# EAGLE board TSOC_USBUART2 (EAGLE 6.6.0)
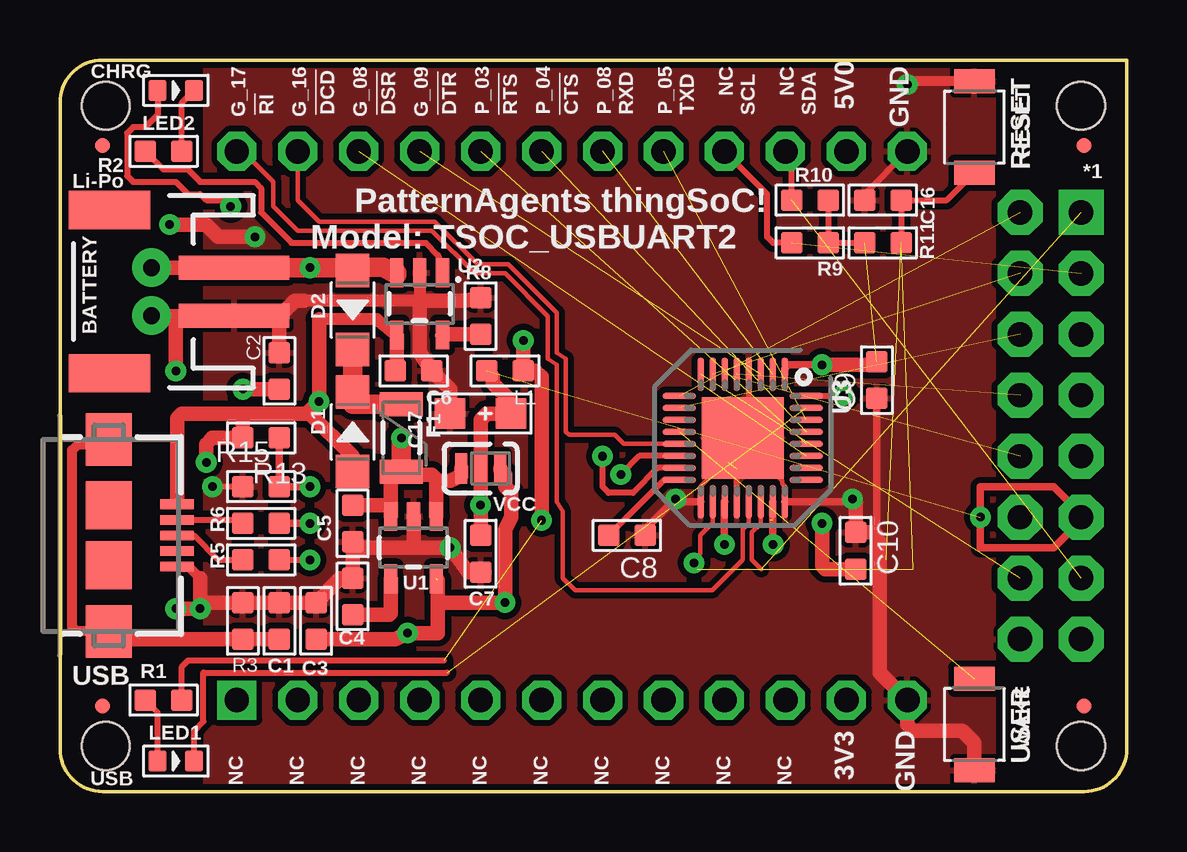
[diagram p0: board, top side]
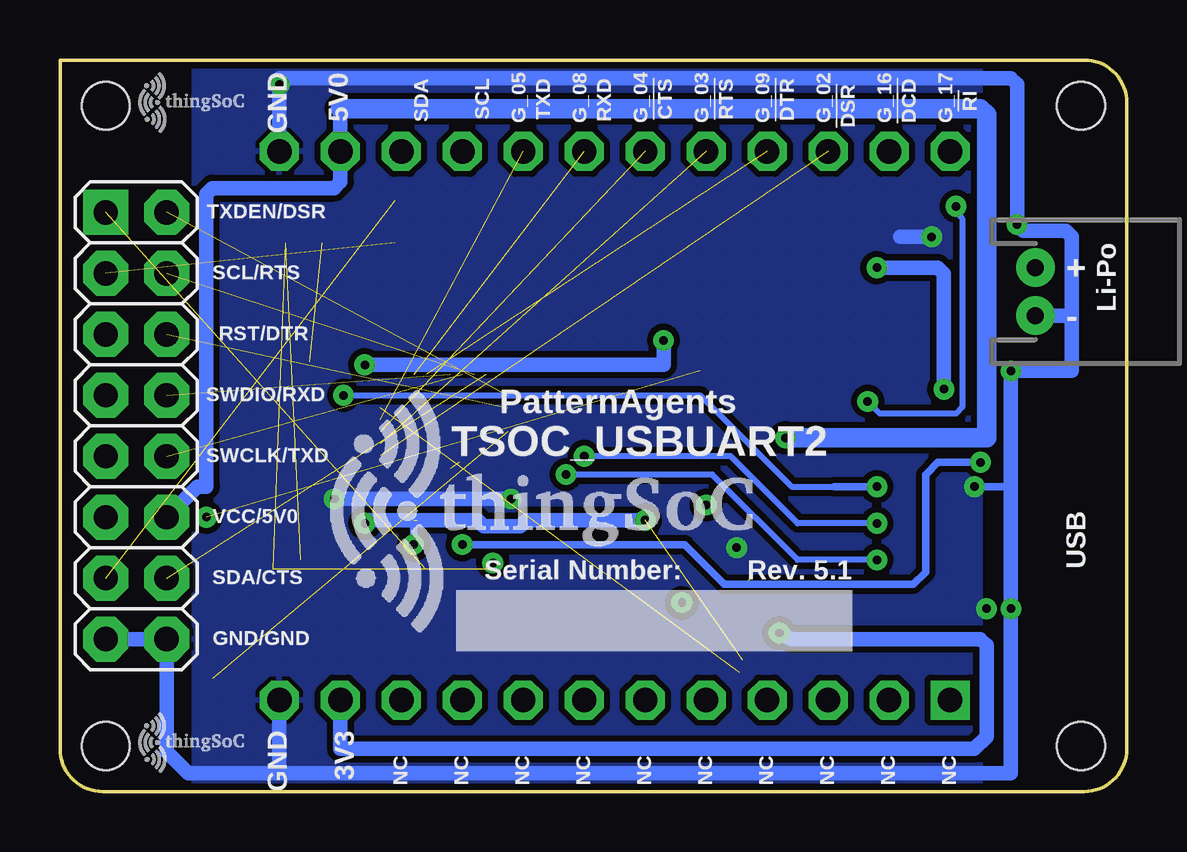
[diagram p1: board, bottom side, seen from below]

Size 44.45 x 30.48 mm. Coordinates in mm from the lower left corner, seen from the top.
Copper layers (1*16): Top 0.035mm / dielectric 1.5mm / Bottom 0.035mm
Design rules "PatternAgents_7mil": minimum track width 7mil, minimum drill 14mil, track to track 7mil, track to pad 7mil, pad to pad 7mil, via to via 7mil, smd to smd 7mil, copper to edge 7mil, drill to drill 7mil, minimum pad ring 12mil, minimum via ring 10mil, stop-mask expansion 4mil, vias tented up to drill 25mil, thermal gap 7mil
Net classes: 1 vcc: width 0.254 mm

## Footprints (pad centres in the part's own frame; a part is rotated, then mirrored left to right if it is on the bottom)
TSOC-BB-S24 = drill 1.016 square: 1B -11.43,11.43 | drill 1.016 octagon: 1C 11.43,11.43; 2B -11.43,8.89; 2C 11.43,8.89; 3B -11.43,6.35; 3C 11.43,6.35; 4B -11.43,3.81; 4C 11.43,3.81; 5B -11.43,1.27; 5C 11.43,1.27; 6B -11.43,-1.27; 6C 11.43,-1.27; 7B -11.43,-3.81; 7C 11.43,-3.81; 8B -11.43,-6.35; 8C 11.43,-6.35; 9B -11.43,-8.89; 9C 11.43,-8.89; 10B -11.43,-11.43; 10C 11.43,-11.43; 11B -11.43,-13.97; 11C 11.43,-13.97; 12B -11.43,-16.51; 12C 11.43,-16.51
JST-2-SMD = smd 1 x 4.6: 1 -1,-3.7; 2 1,-3.7 | smd 1.6 x 3.4: NC1 -3.4,1.5; NC2 3.4,1.5
C0603 = smd 0.889 x 0.889: 1 0,0.762; 2 0,-0.762
AVX-A = smd 1.27 x 1.27: + -1.27,0; - 1.27,0
SOD-123 = smd 1.397 x 1.397: + -1.651,0; - 1.651,0
PTC-1206 = smd 1 x 1.8: 1 -1.4,0; 2 1.4,0
MICRO-FIDUCIAL = smd 0.635 x 0.635: 1 0,0
JST-2-PTH-NS = drill 0.7 pad 1.6: 1 -1,0; 2 1,0
2X8 = drill 1.016 pad 1.88 square: 1 0,0 | drill 1.016 pad 1.88 octagon: 2 0,2.54; 3 2.54,0; 4 2.54,2.54; 5 5.08,0; 6 5.08,2.54; 7 7.62,0; 8 7.62,2.54; 9 10.16,0; 10 10.16,2.54; 11 12.7,0; 12 12.7,2.54; 13 15.24,0; 14 15.24,2.54; 15 17.78,0; 16 17.78,2.54
L0603 = smd 0.889 x 0.889: 1 -0.762,0; 2 0.762,0
LED-0603 = smd 0.762 x 0.889: + -0.762,0; - 0.762,0
R0603 = smd 0.889 x 0.889: 1 0,0.762; 2 0,-0.762
SW2-2.6-3.0X2.5X1.2+0.4MM = smd 1 x 1.7: 1 -1.9,0; 2 1.9,0
SOT23-5 = smd 0.55 x 1.2: 1 -0.95,-1.3; 2 0,-1.3; 3 0.95,-1.3; 4 0.95,1.3; 5 -0.95,1.3
QFN32-PROTO = smd 1.4 x 0.254: 1 -2.65,1.75; 2 -2.65,1.25; 3 -2.65,0.75; 4 -2.65,0.25; 5 -2.65,-0.25; 6 -2.65,-0.75; 7 -2.65,-1.25; 8 -2.65,-1.75; 17 2.65,-1.75; 18 2.65,-1.25; 19 2.65,-0.75; 20 2.65,-0.25; 21 2.65,0.25; 22 2.65,0.75; 23 2.65,1.25; 24 2.65,1.75 | smd 0.254 x 1.4: 9 -1.75,-2.65; 10 -1.25,-2.65; 11 -0.75,-2.65; 12 -0.25,-2.65; 13 0.25,-2.65; 14 0.75,-2.65; 15 1.25,-2.65; 16 1.75,-2.65; 25 1.75,2.65; 26 1.25,2.65; 27 0.75,2.65; 28 0.25,2.65; 29 -0.25,2.65; 30 -0.75,2.65; 31 -1.25,2.65; 32 -1.75,2.65 | smd 3.4 x 3.4: EXP 0,0
TSOC-BB-BRD-DIM = hole 2: 13.335,16.891; -13.335,16.891; 13.335,-23.749; -13.335,-23.749
USB-AB-MICRO-SMD = smd 1.4 x 0.4: D+ 2.85,0; D- 2.85,0.65; GND 2.85,-1.3; ID 2.85,-0.65; VBUS 2.85,1.3 | smd 1.9 x 2: P$6 0,1.25; P$7 0,-1.25 | smd 1.9 x 2.2: SHIELD1 0,4; SHIELD2 0,-4
JMP-3-1_2 = smd 0.508 x 1.27: 1 -0.813,0; 2 0,0; 3 0.813,0

## Placement (x,y rotation side)
A  TSOC-24-BB  [TSOC-BB-S24]  18.8,15.24 90 top
BATTERY  [JST-2-SMD]  3.56,20.83 90 top
C1  100nf  [C0603]  9.14,7.11 180 top
C2  1uf  [C0603]  9.14,17.53 180 top
C3  10uf  [C0603]  10.67,7.11 0 top
C4  100nf  [C0603]  12.19,8.13 180 top
C5  10uf  [C0603]  12.19,11.18 0 top
C6  1uf  [C0603]  14.73,17.53 90 top
C7  10uf  [C0603]  17.53,9.91 180 top
C8  1uf  [C0603]  23.62,10.67 270 top
C9  100nf  [C0603]  34.04,17.14 180 top
C10  100nf  [C0603]  33.15,10.03 0 top
C16  100nf  [C0603]  34.29,24.64 270 top
C17  47uf  [AVX-A]  17.53,15.75 180 top
D1  20V-1A  [SOD-123]  12.19,14.99 90 top
D2  20V-1A  [SOD-123]  12.19,20.07 270 top
F1  500mA-PTC  [PTC-1206]  14.22,14.73 270 top
FID1  FIDUCIALUFIDUCIAL  [MICRO-FIDUCIAL]  1.78,3.56 180 top
FID2  FIDUCIALUFIDUCIAL  [MICRO-FIDUCIAL]  1.78,26.92 180 top
FID3  FIDUCIALUFIDUCIAL  [MICRO-FIDUCIAL]  42.67,3.56 180 top
FID4  FIDUCIALUFIDUCIAL  [MICRO-FIDUCIAL]  42.67,26.92 180 top
J1P  [JST-2-PTH-NS]  3.81,20.83 270 bottom
J3  [2X8]  42.55,24.13 270 bottom
L1  330OHM-500MA  [L0603]  18.54,17.53 0 top
LED1  GREEN-0603  [LED-0603]  4.83,1.27 0 top
LED2  YELLOW-0603  [LED-0603]  4.83,29.21 0 top
R1  1K 1/10W  [R0603]  4.32,3.81 90 top
R2  1K 1/10W  [R0603]  4.32,26.67 90 top
R3  1M 1/10W  [R0603]  7.62,7.11 180 top
R5  22R  [R0603]  8.38,9.65 90 top
R6  22R  [R0603]  8.38,11.18 90 top
R8  10K 1/10W  [R0603]  17.53,19.81 0 top
R9  10K 1/10W  [R0603]  31.24,22.86 90 top
R10  10K 1/10W  [R0603]  31.24,24.64 90 top
R11  10K 1/10W  [R0603]  34.29,22.86 270 top
R13  22K  [R0603]  8.38,14.73 90 top
R15  10K  [R0603]  8.38,12.7 270 top
RESET  B3U-1000P-2P-SMD  [SW2-2.6-3.0X2.5X1.2+0.4MM]  38.1,27.69 270 top
U1  AP2112K-3.3V  [SOT23-5]  14.73,10.16 180 top
U2  MCP73831  [SOT23-5]  14.99,20.32 180 top
U3  CY7C65215-32-PROTO  [QFN32-PROTO]  28.45,14.73 270 top
U$1  TSOC-PCB-SINGLE  [TSOC-BB-BRD-DIM]  18.8,15.24 90 top
U$100  TSOC-LOGO-LRG  [TSOC-LOGO-LRG]  29.97,11.68 0 bottom
U$101  TSOC-LOGO-SMALL  [TSOC-LOGO-SML]  40.39,2.03 0 bottom
U$102  TSOC-LOGO-SMALL  [TSOC-LOGO-SML]  40.39,28.7 0 bottom
USB  USB_AB  [USB-AB-MICRO-SMD]  2.03,10.67 0 top
USER  B3U-1000P-2P-SMD  [SW2-2.6-3.0X2.5X1.2+0.4MM]  38.1,2.79 90 top
VCC  JMP-3-1_2  [JMP-3-1_2]  17.53,13.46 180 top

## Library data of the parts
A U$1 U$100-U$102 = thingSoC
BATTERY = TSOC-ESP8266-BASE; BTM_NEG: -; BTM_POS: +; PROD_ID: CONN-11443; TOP_NEG: -; TOP_POS: +
C1 C4 C9 C10 C16 = Seeed-Capacitor-2016; MPN: CC0603KRX7R9BB104
C2 C6 C8 = Seeed-Capacitor-2016; MPN: CC0603KRX7R8BB105
C3 C5 C7 = Seeed-Capacitor-2016; MPN: CC0603KRX5R6BB106
C17 = Seeed-Capacitor-2016; MPN: TAJA476*006#NJ
D1 D2 = Seeed-Diode-2016; MPN: B5819W
F1 = SparkFun
FID1-FID4 J1P = TSOC-ESP8266-BASE
J3 = PatternAgents-ProtoPads
L1 = Seeed-Inductor-2016; MPN: BLM18AG121SN1D
LED1 = Seeed-LED-2016; MPN: 19-217-G7C-AN1P2-3T
LED2 = Seeed-LED-2016; MPN: 19-217-Y5C-AM1N1VY-3T
R1 R2 = Seeed-Resistor-2016; MPN: RC0603JR-071KL
R3 = Seeed-Resistor-2016; MPN: RC0603JR-071ML
R5 R6 = Seeed-Resistor-2016; MPN: RC0603JR-0722RL
R8-R11 = Seeed-Resistor-2016; MPN: RC0603JR-0710KL
R13 = Seeed-Resistor-2016; MPN: RC0603JR-0722KL
R15 = Seeed-Resistor-2016; MPN: RC0603FR-0710KL
RESET USER = Seeed-Switch-2016; MPN: B3U-1000P-2P-SMD
U1 = SparkFun-PowerIC; PROD_ID: VREG-12457
U2 = TSOC-ESP8266-BASE; PROD_ID: IC-09995
U3 = PatternAgents-Cypress
USB = BeeSafe
VCC = PatternAgents-ProtoPads; BOM: EXCLUDE

## Nets
3V3: A.11B C3.2 U1.5 VCC.1
5V0: A.11C C5.1 F1.2 J3.12 U1.1 U1.3 VCC.3
!CTS: A.6C U3.29
!CTS1: J3.14 U3.8
!DCD: A.2C U3.13
!DSR: A.3C U3.27
!DSR1: J3.2 U3.9
!DTR: A.4C U3.3
!DTR1: J3.6 U3.10
!POWER: LED1.- U3.31
!RI: A.1C U3.21
!RTS: A.5C U3.28
!RTS1: J3.4 U3.7
!RX_LED: U3.26
!TX_LED: U3.25
!XRES: C16.1 R11.1 RESET.2 U3.18
BUS_DET: R13.2 R15.1 U3.32
BYPASS1: C4.1 U1.4
CLED: LED2.- R2.2
CSTAT: R2.1 U2.1
GND: A.12B A.12C BATTERY.1 C1.2 C2.2 C3.1 C4.2 C5.2 C6.2 C7.1 C8.1 C9.1 C10.1 C16.2 C17.- J1P.2 J3.15 J3.16 R3.2 R8.1 R15.2 RESET.1 U1.2 U2.2 U3.4 U3.17 U3.20 U3.24 U3.EXP USB.GND USER.1
N$1: R8.2 U2.5
N$17: LED1.+ R1.1
RXD: A.7C U3.2
RXD1: J3.8 U3.5
SCL: A.9C J3.3 R9.1
SDA: A.10C J3.13 R10.1
SUSP: U3.11
TXD: A.8C U3.30
TXD1: J3.10 U3.6
TXDEN_1: J3.1 U3.22
USB1_DM: R6.2 U3.15
USB1_DP: R5.2 U3.14
USB1_M: R6.1 USB.D-
USB1_P: R5.1 USB.D+
USB1_SHIELD: C1.1 R3.1 USB.SHIELD1 USB.SHIELD2
VBAT: BATTERY.2 C2.1 D2.+ J1P.1 U2.3
VBUS: C6.1 D1.+ LED2.+ R13.1 U2.4 U3.19 USB.VBUS
VCC: C7.2 C17.+ J3.11 L1.1 VCC.2
VCCD: C8.2 U3.16
VDDIO: C9.2 C10.2 L1.2 R1.2 R9.2 R10.2 R11.2 U3.1 U3.23
VIN: D1.- D2.- F1.1
WAKE: U3.12 USER.2

## Tracks (layer width: path | path; a pad name or v marks a point on that pad's centre or on a via)
3V3  (via drill 0.36)  (1 unrouted)
  Top 0.61: C3.2 13.97,6.35 v14.48,6.6 15.75,6.6 15.75,7.87 | VCC.1 18.34,13.41 18.54,13.21 18.54,12.7 18.8,12.45 18.8,11.43 18.54,10.92 v18.54,7.87 15.75,7.87 | 15.75,8.79 15.75,7.87
  Bottom 0.61: v14.48,6.6 13.97,6.35 6.1,6.35 5.84,6.1 5.84,2.29 6.35,1.78 32.77,1.78 A.11B
5V0  (via drill 0.36)
  Top 0.61: C5.1 13.75,11.94 U1.3 13.78,13.14 F1.2 13.84,13.21 15.49,13.21 15.68,13.02 | U1.1 15.68,13.02 | VCC.3 16.71,13.16 16.26,12.95 15.75,12.95 15.68,13.02
  Top 0.813: F1.2 v14.22,14.73
  Bottom 0.61: 32.77,28.45 A.11C 32.77,25.4 33.02,25.15 38.1,25.15 38.35,24.89 38.35,12.7 38.73,12.7 J3.12
  Bottom 0.813: v14.22,14.73 5.84,14.73 5.84,28.19 6.1,28.45 32.77,28.45
!CTS  (1 unrouted)
!CTS1  (1 unrouted)
!DCD
  Top 0.178: U3.13 23.49,14.48 23.11,14.86 21.21,14.86 21.08,14.99 21.08,18.03 20.7,18.29 20.7,19.94 18.67,21.97 17.4,21.97 15.62,23.75 10.79,23.75 9.91,24.64 A.2C
!DSR  (1 unrouted)
!DSR1  (1 unrouted)
!DTR  (1 unrouted)
!DTR1  (1 unrouted)
!POWER  (1 unrouted)
  Top 0.254: LED1.- 5.59,2.54 5.97,2.92 5.97,4.95 16.13,4.95
!RI
  Top 0.178: U3.21 28.7,11.17 28.45,10.92 28.45,9.65 27.18,8.38 21.46,8.38 20.95,8.89 20.95,11.68 20.7,12.06 20.7,17.78 20.32,18.03 20.32,19.81 18.54,21.59 17.27,21.59 15.49,23.37 9.91,23.37 8.89,24.38 8.89,25.4 7.62,26.67 A.1C
!RTS  (1 unrouted)
!RTS1  (1 unrouted)
!XRES  (via drill 0.36)  (3 unrouted)
  Top 0.178: U3.18 27.2,11.2 26.67,10.67 26.67,9.91 v26.42,9.53
  Top 0.254: RESET.2 36.95,24.64 C16.1 R11.1
  Bottom 0.178: v26.42,9.53 26.42,9.4 26.54,9.27
BUS_DET  (via drill 0.36)
  Top 0.254: U3.32 32.74,16.48 v32.64,16.51
  Top 0.305: v10.41,12.7 R15.1 R13.2
  Bottom 0.254: v32.64,16.51 17.78,16.51 13.97,12.7 12.19,12.7
  Bottom 0.305: v10.41,12.7 12.19,12.7
BYPASS1
  Top 0.61: U1.4 13.78,7.43 13.72,7.37 C4.1
CLED
  Top 0.254: R2.2 5.08,28.7 LED2.-
CSTAT
  Top 0.254: U2.1 16,21.69 15.75,22.35 15.24,22.86 9.65,22.86 8.38,24.13 8.38,25.15 8.13,25.4 5.84,25.4 5.33,25.91 4.32,25.91 R2.1
GND  (via drill 0.36)  (1 unrouted)
  Top 0.178: 26.7,12.73 27.69,13.72 27.82,13.72 28.2,14.1 | U3.EXP 29.97,13.21 29.97,13.08 30.1,12.95 30.1,12.83 30.23,12.7 30.23,12.11 U3.24
  Top 0.254: R15.2 v6.35,12.7 | C16.2 33.53,24.89 A.12C | U3.20 28.2,14.1 28.2,14.48 U3.EXP 28.7,14.99 28.7,15.24 U3.4
  Top 0.305: 28.2,13.46 28.19,13.46 | C8.1 24.38,10.92 v25.65,12.19 25.76,12.08 U3.17 | C9.1 34.04,10.67 | U3.24 32.91,12.08 v33.02,12.19
  Top 0.406: USB.GND 5.36,9.37 5.84,8.89 | RESET.1 35.43,29.59 v35.31,29.46
  Top 0.508: U2.2 14.99,20.45 10.16,20.45
  Top 0.61: 5.84,8.89 v5.84,7.62 | 9.14,19.81 7.27,19.81 BATTERY.1 7.24,19.81 4.83,19.81 | C2.2 9.14,19.81 | R8.1 16.89,20.45 14.99,20.45 14.99,18.29 C6.2 16.26,16.76 C17.- | 4.83,19.81 v4.83,17.53 | 4.83,19.81 3.83,19.81 J1P.2 | v5.84,7.62 v4.83,7.62 | 14.73,10.16 U1.2 | USER.1 38.1,2.03 37.59,2.54 35.56,2.54 35.31,2.79 A.12B 34.16,4.95 34.16,10.41 34.04,10.54 34.04,10.67 33.91,10.79 C10.1 33.15,12.06 v33.02,12.19 | 10.16,20.45 9.78,20.45 9.14,19.81 | 14.73,10.16 v16.26,10.16 17.02,9.14 C7.1 | 14.73,10.16 12.45,10.16 C5.2 C4.2 11.68,8.89 C3.1 C1.2 R3.2 6.1,7.87 v5.84,7.62 | v4.57,23.62 6.1,23.62 6.6,23.11 v8.13,23.11
  Bottom 0.305: v6.35,12.7 4.83,12.7
  Bottom 0.61: 35.31,0.76 39.12,0.76 40.01,1.65 J3.16 J3.15 | 35.31,0.76 4.83,0.76 v4.83,7.62 4.83,12.7 v4.83,17.53 2.29,17.53 2.29,19.81 | A.12C v35.31,29.46 35.31,29.72 4.83,29.72 4.57,29.46 v4.57,23.62 4.32,23.37 2.54,23.37 2.29,23.11 2.29,19.81 | v8.13,23.11 9.45,23.11 | J1P.2 2.3,19.83 2.29,19.81 | A.12B 35.31,0.76 | v25.65,12.19 v33.02,12.19
  pour Top (isolate 0.254, hatched): 38.86,30.48 38.86,0 6.1,0 6.1,30.48
  pour Bottom (isolate 0.254, hatched): 38.86,30.48 38.86,0 6.1,0 6.1,30.48
N$1
  Top 0.61: R8.2 15.97,19.05 U2.5
N$17
  Top 0.254: LED1.+ 4.06,3.3 R1.1
RXD  (1 unrouted)
RXD1  (1 unrouted)
SCL  (1 unrouted)
  Top 0.254: R9.1 29.72,22.86 29.46,23.11 29.46,24.89 A.9C
SDA  (1 unrouted)
  Top 0.254: R10.1 30.48,26.42 A.10C
TXD  (1 unrouted)
TXD1  (1 unrouted)
TXDEN_1  (1 unrouted)
  Top 0.178: U3.22 29.2,11.16 28.83,10.79 28.83,9.65 29.21,9.27
USB1_DM  (via drill 0.36)
  Top 0.254: U3.15 24.91,13.48 23.88,12.45 22.86,12.45 22.61,12.7 v22.61,13.97
  Top 0.305: R6.2 v10.41,11.18
  Bottom 0.254: v10.41,11.18 13.72,11.18 16.51,13.97 v22.61,13.97
USB1_DP  (via drill 0.36)
  Top 0.254: R5.2 v10.41,9.65 | 25.79,13.97 U3.14 24.14,13.98 v23.37,13.21
  Bottom 0.254: v10.41,9.65 13.72,9.65 17.27,13.21 v23.37,13.21
USB1_M
  Top 0.254: USB.D- 7.48,11.32 R6.1
USB1_P
  Top 0.254: USB.D+ 5.59,10.67 6.6,9.65 R5.1
USB1_SHIELD
  Top 0.406: USB.SHIELD2 0.7,6.67 0.51,6.86 0.51,14.22 0.76,14.48 1.84,14.48
  Top 0.61: C1.1 R3.1 2.35,6.35 USB.SHIELD2 2.6,6.1 | 1.84,14.48 USB.SHIELD1
VBAT  (via drill 0.36)
  Top 0.61: C2.1 v7.62,16.76 | BATTERY.2 J1P.1
  Top 0.813: BATTERY.2 v10.41,21.83 11.57,21.83 D2.+ 12.32,21.84 13.46,21.84 14.04,21.52 U2.3
  Bottom 0.61: v7.62,16.76 7.62,21.57 7.87,21.83 v10.41,21.83
VBUS  (via drill 0.36)
  Top 0.178: USB.VBUS 4.98,11.91 4.88,12.19
  Top 0.254: LED2.+ 4.06,28.19 3.56,27.69 3.05,27.69 2.79,27.43 2.79,25.65 3.05,25.4 4.83,25.4 5.33,24.89 5.84,24.89 6.1,24.64 6.86,24.64 v7.11,24.38
  Top 0.305: v27.69,10.29 27.69,12.07 U3.19
  Top 0.508: U2.4 14,19.02 13.21,19.68 10.79,19.68
  Top 0.61: 10.79,19.68 v10.79,16.26 10.35,15.81 | U2.4 14.04,17.71 C6.1 | 4.88,12.19 4.88,15.55 5.08,15.75 7.62,15.75 | 7.62,15.75 10.29,15.75 10.35,15.81 | D1.+ 12.19,13.97 10.35,15.81 | v6.1,13.72 6.1,14.48 6.35,14.73 R13.1 7.62,15.75
  Bottom 0.254: v7.11,24.38 7.11,24.13 6.86,23.88 6.86,16 7.11,15.75 10.29,15.75 v10.79,16.26
  Bottom 0.305: v6.1,13.72 7.87,13.72 8.38,13.21 8.38,9.14 8.89,8.64 16.76,8.64 18.41,10.29 v27.69,10.29
VCC  (via drill 0.36)  (1 unrouted)
  Top 0.178: 17.42,10.77 C7.2
  Top 0.305: J3.11 42.55,11.3 41.4,10.16 38.35,10.16 v38.35,11.43 38.35,12.7 41.4,12.7 42.67,11.43
  Top 0.61: C7.2 v17.53,11.94 VCC.2 17.53,15.49 17.78,15.75 C17.+ 18.8,16.26 18.03,17.02 18.03,17.27 L1.1
VCCD
  Top 0.254: U3.16 25.17,12.98 C8.2
  Top 0.305: 22.99,10.79 C8.2
VDDIO  (via drill 0.36)  (3 unrouted)
  Top 0.254: R10.2 R9.2 R11.2 | R1.2 5.08,5.21 5.33,5.46 16,5.46
  Top 0.305: U3.23 29.7,10.94 v29.72,10.29 | U3.1 30.2,17.62 30.35,17.78 v31.75,17.78
  Top 0.61: v19.3,18.8 L1.2 19.81,17.53 20.07,17.27 v20.07,11.3 | C10.2 31.88,9.27 31.75,9.4 v31.75,11.18 | v31.75,17.78 33.91,17.78 C9.2
  Bottom 0.305: v29.72,10.29 29.72,11.3
  Bottom 0.61: v19.3,18.8 19.3,17.78 v31.75,17.78 | v20.07,11.3 25.02,11.3 25.27,11.05 26.8,11.05 27.05,11.3 29.57,11.3 | 29.72,11.3 31.62,11.3 v31.75,11.18
VIN
  Top 0.813: F1.1 12.19,16.13 D1.- D2.-
WAKE  (1 unrouted)

## Text on the board
tPlace: CHRG | G_17 | G_16 | G_08 | G_09 | P_03 | P_04 | P_08 | P_05 | NC | NC | 5V0 | GND | !RI | !DCD | !DSR | !DTR | !RTS | !CTS | RXD | TXD | SCL | SDA | RESET | *1 | Li-Po | PatternAgents thingSoC! | Model: TSOC_USBUART2 | 3V3 | GND | WAKE | USB | NC | NC | NC | NC | NC | NC | NC | NC | NC | NC
bPlace: G_17 | !DCD | G_16 | G_02 | !DTR | G_09 | !RTS | G_03 | !CTS | G_04 | RXD | G_08 | TXD | G_05 | SCL | SDA | 5V0 | GND | !RI | !DSR | TXDEN/DSR | Li-Po | + | SCL/RTS | - | RST/DTR | PatternAgents | SWDIO/RXD | TSOC_USBUART2 | SWCLK/TXD | USB | VCC/5V0 | Rev. 5.1 | Serial Number: | SDA/CTS | GND/GND | 3V3 | GND | NC | NC | NC | NC | NC | NC | NC | NC | NC | NC